# EAGLE board mjoy (EAGLE 5.10)
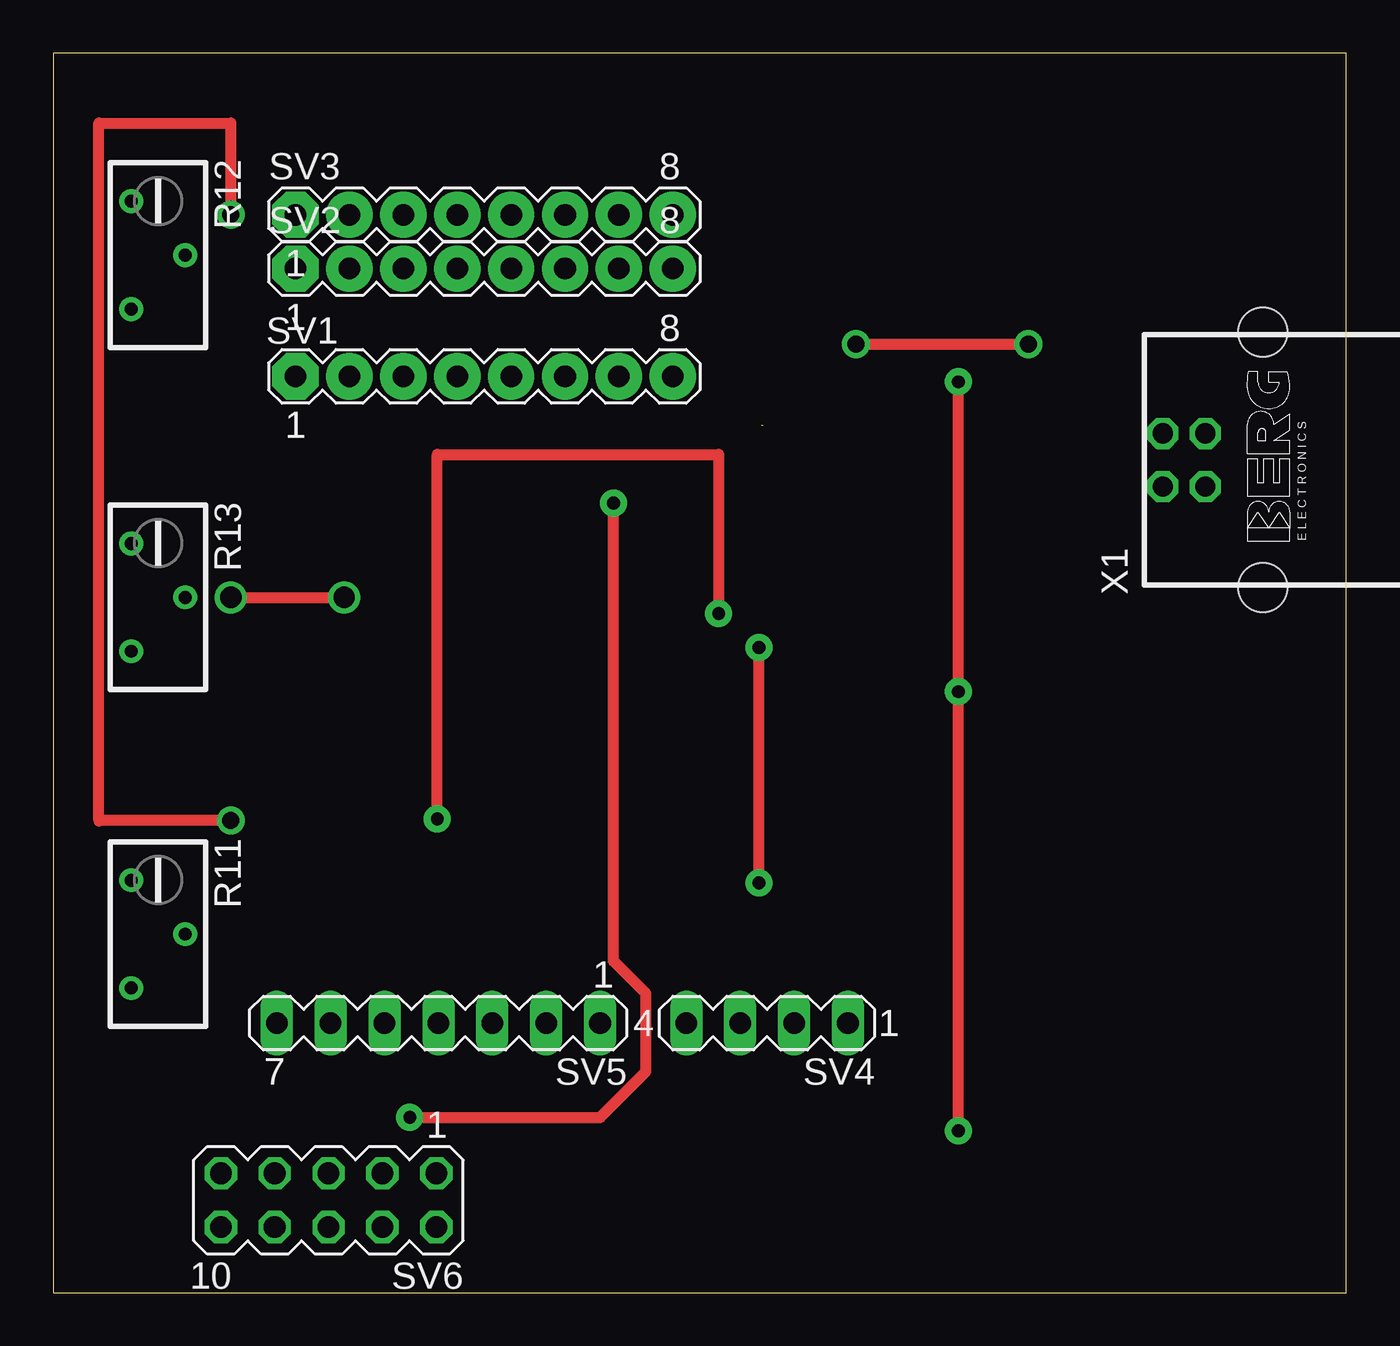
[diagram p0: board, top side]
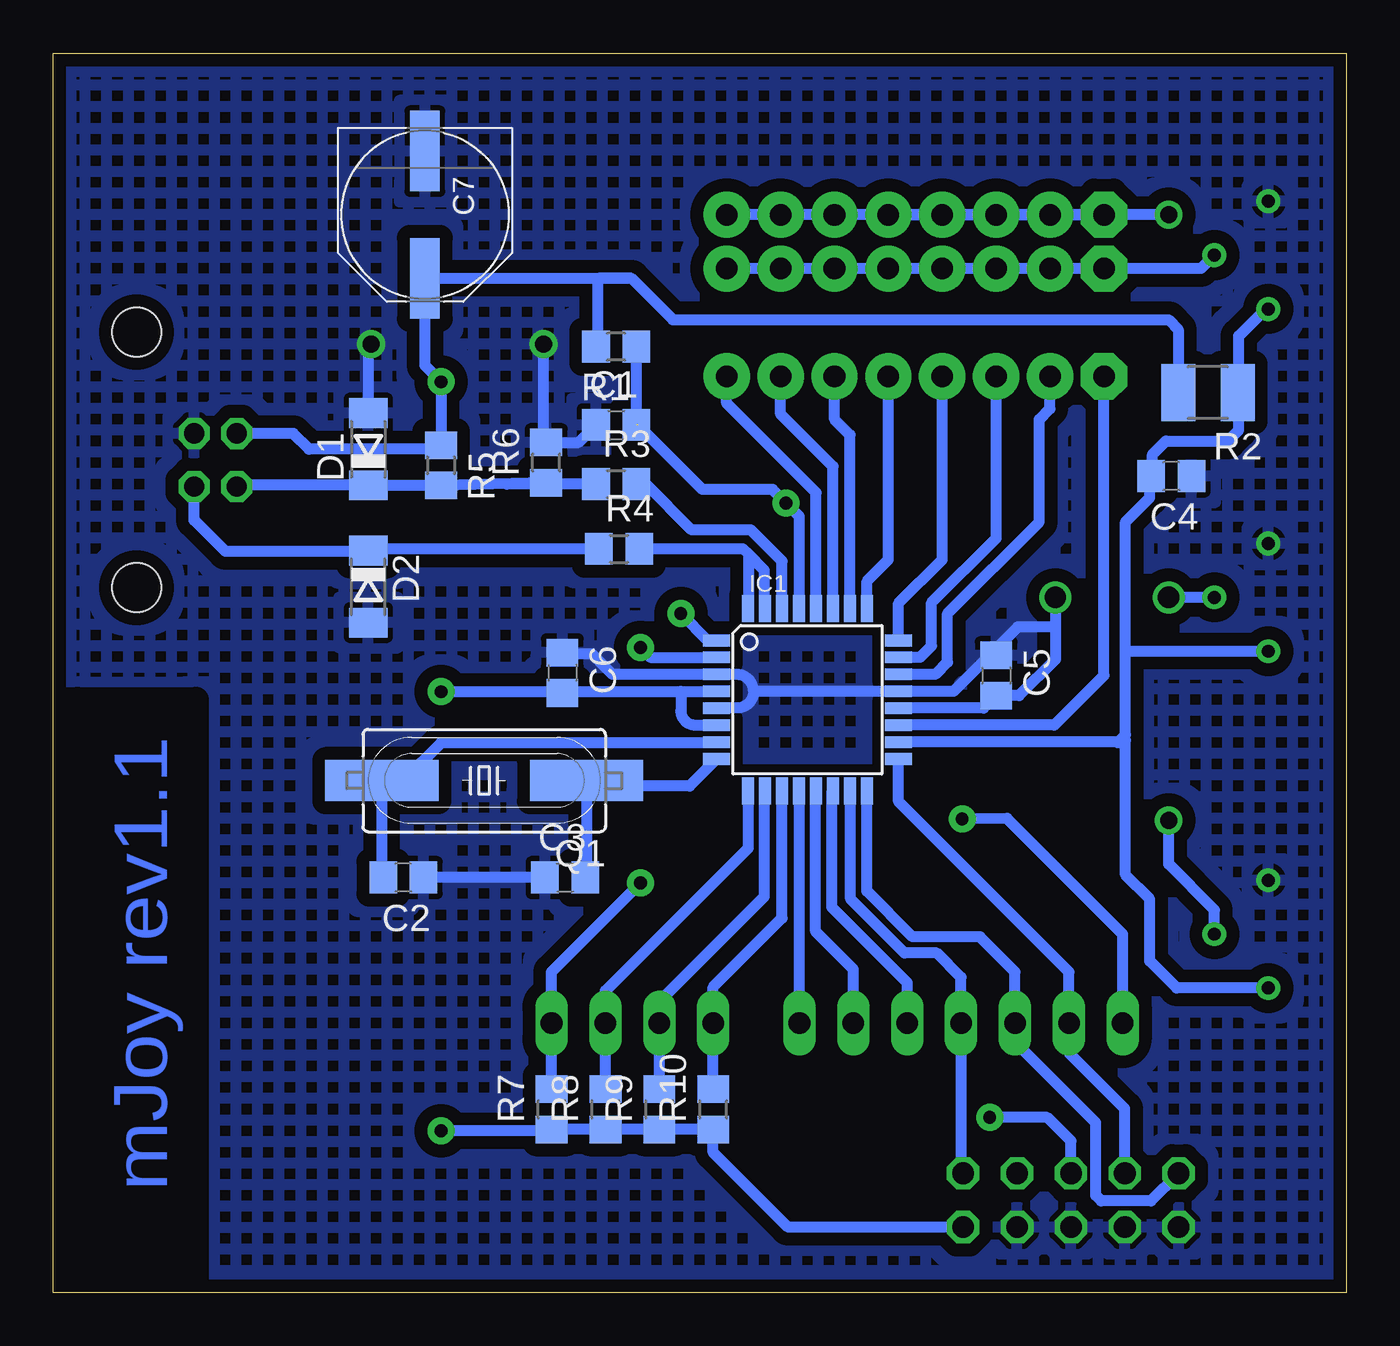
[diagram p1: board, bottom side, seen from below]

Size 60.96 x 58.42 mm. Coordinates in mm from the lower left corner, seen from the top.
Outline: 0,0 60.96,0 60.96,58.42 0,58.42 0,0
Copper layers (1*16): Top 0.035mm / dielectric 1.5mm / Bottom 0.035mm
Design rules "dimka": minimum track width 10mil, minimum drill 20mil, track to track 10mil, track to pad 10mil, pad to pad 10mil, via to via 10mil, smd to smd 10mil, copper to edge 10mil, drill to drill 10mil, minimum pad ring 10mil, minimum via ring 10mil, stop-mask expansion 4mil, vias tented up to drill 0mil, thermal gap 10mil
bRestrict: area 54.2,1 to 59.8,27.9

## Footprints (pad centres in the part's own frame; a part is rotated, then mirrored left to right if it is on the bottom)
C0805 = smd 1.3 x 1.5: 1 -0.95,0; 2 0.95,0
PANASONIC_E = smd 3.8 x 1.4: + 3,0; - -3,0
SOD80C = smd 1.4 x 1.8: A 1.7,0; C -1.7,0
TQFP32-08 = smd 1.27 x 0.559: 1 -4.293,2.8; 2 -4.293,2; 3 -4.293,1.2; 4 -4.293,0.4; 5 -4.293,-0.4; 6 -4.293,-1.2; 7 -4.293,-2; 8 -4.293,-2.8; 17 4.293,-2.8; 18 4.293,-2; 19 4.293,-1.2; 20 4.293,-0.4; 21 4.293,0.4; 22 4.293,1.2; 23 4.293,2; 24 4.293,2.8 | smd 0.559 x 1.27: 9 -2.8,-4.293; 10 -2,-4.293; 11 -1.2,-4.293; 12 -0.4,-4.293; 13 0.4,-4.293; 14 1.2,-4.293; 15 2,-4.293; 16 2.8,-4.293; 25 2.8,4.293; 26 2,4.293; 27 1.2,4.293; 28 0.4,4.293; 29 -0.4,4.293; 30 -1.2,4.293; 31 -2,4.293; 32 -2.8,4.293
HC49UP = smd 5.334 x 1.93: 1 -4.826,0; 2 4.826,0
R0805 = smd 1.3 x 1.5: 1 -0.95,0; 2 0.95,0
R1210 = smd 1.6 x 2.7: 1 -1.4,0; 2 1.4,0
RTRIM3296Y = drill 0.61 round: 1 1.27,-2.54; 2 -1.27,0; 3 1.27,2.54
MA08-1 = drill 1.016 pad 2.184 octagon: 1 -8.89,0 | drill 1.016 pad 2.184 round: 2 -6.35,0; 3 -3.81,0; 4 -1.27,0; 5 1.27,0; 6 3.81,0; 7 6.35,0; 8 8.89,0
MA04-1 = drill 1.016 long: 1 -3.81,0; 2 -1.27,0; 3 1.27,0; 4 3.81,0
MA07-1 = drill 1.016 long: 1 -7.62,0; 2 -5.08,0; 3 -2.54,0; 4 0,0; 5 2.54,0; 6 5.08,0; 7 7.62,0
MA05-2 = drill 1.016 octagon: 1 -5.08,-1.27; 2 -5.08,1.27; 3 -2.54,-1.27; 4 -2.54,1.27; 5 0,-1.27; 6 0,1.27; 7 2.54,-1.27; 8 2.54,1.27; 9 5.08,-1.27; 10 5.08,1.27
PN61729 = drill 0.95 octagon: 1 1.25,4.71; 2 -1.25,4.71; 3 -1.25,2.71; 4 1.25,2.71 | hole 2.3: -6.02,0; 6.02,0

## Placement (x,y rotation side)
C1  0.1u  [C0805]  34.42,40.89 0 bottom
C2  22p  [C0805]  44.45,19.56 180 bottom
C3  22p  [C0805]  36.83,19.56 0 bottom
C4  0.1u  [C0805]  8.25,38.48 180 bottom
C5  0.1u  [C0805]  16.51,29.08 270 bottom
C6  0.1u  [C0805]  36.96,29.21 270 bottom
C7  100u  [PANASONIC_E]  43.43,50.8 270 bottom
D1  3.3V  [SOD80C]  46.1,39.75 90 bottom
D2  3.3V  [SOD80C]  46.1,33.27 270 bottom
IC1  MEGA8-AI  [TQFP32-08]  25.4,27.94 0 bottom
Q1  12MHz  [HC49UP]  40.64,24.13 180 bottom
R1  10k  [R0805]  34.42,44.58 180 bottom
R2  10uH  [R1210]  6.53,42.42 180 bottom
R3  82  [R0805]  34.42,38.1 0 bottom
R4  82  [R0805]  34.29,35.05 0 bottom
R5  2k2  [R0805]  42.67,38.99 270 bottom
R6  4k7  [R0805]  37.72,39.12 90 bottom
R7  10k  [R0805]  37.47,8.64 90 bottom
R8  10k  [R0805]  34.93,8.64 90 bottom
R9  10k  [R0805]  32.39,8.64 90 bottom
R10  10k  [R0805]  29.85,8.64 90 bottom
R11  [RTRIM3296Y]  4.95,16.89 180 top
R12  [RTRIM3296Y]  4.95,48.9 180 top
R13  [RTRIM3296Y]  4.95,32.77 180 top
SV1  R_SIG  [MA08-1]  20.32,43.18 0 top
SV2  R_GND  [MA08-1]  20.32,48.26 0 top
SV3  R_VCC  [MA08-1]  20.32,50.8 0 top
SV4  BUT_X  [MA04-1]  33.66,12.7 180 top
SV5  BUT_Y  [MA07-1]  18.16,12.7 180 top
SV6  ISP  [MA05-2]  12.99,4.35 180 top
X1  USB-B  [PN61729]  57.02,39.24 90 top

## Library data of the parts
C1-C7 R1-R13 = rcl
D1 D2 = diode
IC1 = atmel
Q1 = crystal
SV1-SV6 = con-lstb
X1 = con-berg

## Nets
+5V: C6.2 C7.+ IC1.4 IC1.6 R1.2 R2.2 R5.1 R7.1 R8.1 R9.1 R10.1 SV6.2 X1.1
AREF: C5.2 IC1.20 R13.2
GND: C1.1 C2.1 C3.1 C4.1 C5.1 C6.1 C7.- D1.A D2.A IC1.3 IC1.5 IC1.21 R6.2 R11.1 R12.1 R13.1 SV6.4 SV6.6 SV6.8 SV6.10 X1.4
MISO: IC1.16 SV5.5 SV6.9
MOSI: IC1.15 SV5.4 SV6.1
N$2: C4.2 IC1.18 R2.1 R11.3 R12.3 R13.3
N$3: IC1.19 SV1.1
N$4: C3.2 IC1.8 Q1.1
N$5: C2.2 IC1.7 Q1.2
N$6: IC1.22 SV1.2
N$7: IC1.23 SV1.3
N$8: IC1.24 SV1.4
N$9: IC1.25 SV1.5
N$10: IC1.26 SV1.6
N$11: IC1.27 SV1.7
N$12: IC1.28 SV1.8
N$15: IC1.30 R3.2
N$16: IC1.31 IC1.32 R4.2
N$17: D1.C R3.1 R5.2 R6.1 X1.2
N$18: D2.C R4.1 X1.3
N$21: IC1.2 R7.2 SV4.1
N$22: IC1.9 R8.2 SV4.2
N$23: IC1.10 R9.2 SV4.3
N$24: IC1.11 R10.2 SV4.4
N$25: IC1.12 SV5.1
N$26: IC1.13 SV5.2
N$27: IC1.14 SV5.3
N$31: IC1.1 SV5.7
RESET: C1.2 IC1.29 R1.1 SV6.5
RGND: R12.2 SV2.1 SV2.2 SV2.3 SV2.4 SV2.5 SV2.6 SV2.7 SV2.8
RVCC: R11.2 SV3.1 SV3.2 SV3.3 SV3.4 SV3.5 SV3.6 SV3.7 SV3.8
SCK: IC1.17 SV5.6 SV6.7

## Tracks (layer width: path | path; a pad name or v marks a point on that pad's centre or on a via)
+5V  (via drill 0.6 pad 1.27)
  Top 0.508: v42.67,42.93 v42.67,28.32 v42.67,7.62
  Bottom 0.508: R10.1 R9.1 | 37.28,7.69 R7.1 R8.1 | 31.37,28.34 IC1.4 | 36.88,28.34 31.37,28.34 | 36.88,28.34 C6.2 | IC1.6 30.68,26.74 arc90 31.37,27.43 31.37,28.34 | X1.1 49.64,40.49 48.9,39.75 42.86,39.75 R5.1 | 36.88,28.34 42.67,28.34 v42.67,28.32 | R5.1 42.67,39.88 | R5.1 v42.67,42.93 43.43,43.69 43.43,47.75 43.39,47.75 C7.+ 33.7,47.8 | R10.1 29.85,6.6 26.32,3.08 SV6.2 | R10.1 R9.1 | 37.28,7.69 37.34,7.75 37.34,7.62 v42.67,7.62 | R9.1 R8.1 | R8.1 37.28,7.69 | 33.7,47.8 31.75,45.85 8.38,45.85 7.93,45.39 R2.2 | 33.7,47.8 35.26,47.8 35.31,47.75 35.31,44.64 R1.2
AREF  (via drill 1 pad 1.42)
  Top 0.508: v8.38,32.77 v13.72,32.77
  Bottom 0.508: IC1.20 17.1,27.54 C5.2 15.43,28.13 13.72,29.84 v13.72,32.77 | R13.2 v8.38,32.77
GND  (via drill 0.8 pad 1.27)
  Top 0.508: v37.85,44.7 v45.97,44.7
  Bottom 0.508: C3.1 C2.1 | C6.1 36.9,30.1 35.56,30.1 34.6,29.14 IC1.3 28.76,29.14 arc90 27.94,28.32 | 27.94,28.32 arc90 28.7,27.56 29.67,27.56 arc-90 IC1.5 | C1.1 36.2,40.07 R6.2 37.79,40.13 37.85,40.13 v37.85,44.7 | v45.97,44.7 46.1,44.7 D1.A | 14.03,31.37 15.49,31.37 18.52,28.34 IC1.21 27.92,28.34 27.94,28.32
  pour Bottom (isolate 0.61, hatched): 0,58.42 60.96,58.42 60.96,0 0,0
MISO
  Bottom 0.508: IC1.16 22.61,18.92 20.45,16.76 17.27,16.76 15.62,15.11 SV5.5 15.62,11.81 11.81,8 11.81,4.57 11.56,4.32 9.21,4.32 SV6.9
MOSI
  Bottom 0.508: IC1.15 23.37,23.61 23.37,18.54 20.83,16 19.3,16 18.16,14.86 SV5.4 18.16,5.71 SV6.1
N$2
  Bottom 0.508: C4.2 9.14,38.45 | C4.2 9.14,38.54 9.14,39.5 8.51,40.13 5.59,40.13 5.08,40.64 5.08,42.37 R2.1 5.08,42.47 5.08,45.09 3.81,46.35 R12.3 | C4.2 9.27,38.41 9.27,37.47 10.41,36.32 10.41,30.1 | IC1.18 10.83,25.94 10.79,25.91 | 10.41,30.1 10.41,26.29 10.79,25.91 | R13.3 10.29,30.23 10.41,30.1 | 10.79,25.91 10.54,25.91 10.41,26.04 10.41,19.68 9.27,18.54 9.27,15.62 8,14.35 R11.3
N$3
  Bottom 0.508: SV1.1 11.43,29.08 13.77,26.74 IC1.19
N$4
  Bottom 0.508: IC1.8 30.96,23.88 34.16,23.88 34.42,24.13 Q1.1 35.81,19.62 C3.2
N$5
  Bottom 0.508: IC1.7 29.72,25.91 42.67,25.91 44.45,24.13 Q1.2 45.47,19.62 C2.2
N$6
  Bottom 0.508: IC1.22 19.37,29.14 18.8,29.72 18.8,32 14.48,36.32 14.48,41.15 13.97,41.66 SV1.2
N$7
  Bottom 0.508: IC1.23 20.1,29.94 19.56,30.48 19.56,32.51 16.51,35.56 SV1.3
N$8
  Bottom 0.508: IC1.24 21.11,32.49 19.05,34.54 SV1.4
N$9
  Bottom 0.508: IC1.25 22.6,33.53 21.59,34.54 SV1.5
N$10
  Bottom 0.508: IC1.26 23.4,40.42 24.13,41.15 SV1.6
N$11
  Bottom 0.508: IC1.27 24.2,38.93 26.67,41.4 SV1.7
N$12
  Bottom 0.508: SV1.8 29.21,41.91 25,37.7 IC1.28
N$15
  Bottom 0.508: IC1.30 26.6,34.47 28.07,35.94 30.86,35.94 33.02,38.1 R3.2
N$16
  Bottom 0.508: IC1.31 27.43,32.27 27.43,34.04 28.19,34.8 | 28.19,34.8 28.45,35.05 R4.2 | IC1.32 28.19,34.8
N$17
  Bottom 0.508: R3.1 39.56,38.1 R6.1 R5.2 D1.C 52.26,38.05 X1.2
N$18
  Bottom 0.508: R4.1 46.02,35.05 D2.C 46.15,34.92 52.83,34.92 54.31,36.41 X1.3
N$21  (via drill 0.6 pad 1.27)
  Top 0.508: v33.27,19.3 v33.27,30.4
  Bottom 0.508: R7.2 SV4.1 37.47,15.11 v33.27,19.3 | IC1.2 32.81,29.94 v33.27,30.4
N$22
  Bottom 0.508: IC1.9 28.19,20.95 34.93,14.22 SV4.2 R8.2
N$23
  Bottom 0.508: IC1.10 27.43,23.61 27.43,18.67 32.39,13.72 SV4.3 R9.2
N$24
  Bottom 0.508: IC1.11 26.6,17.65 29.85,14.4 SV4.4 R10.2
N$25
  Bottom 0.508: IC1.12 25.78,23.63 SV5.1
N$26
  Bottom 0.508: IC1.13 25.02,23.63 25.02,17.02 23.24,15.24 SV5.2
N$27
  Bottom 0.508: IC1.14 24.26,23.59 24.26,18.16 20.7,14.61 SV5.3
N$31  (via drill 0.6 pad 1.27)
  Top 0.508: v31.37,32 31.37,39.5 18.11,39.5 v18.11,22.33
  Bottom 0.508: IC1.1 30.11,30.74 v31.37,32 | v18.11,22.33 16,22.35 10.54,16.89 SV5.7
RESET  (via drill 0.6 pad 1.27)  (1 unrouted)
  Top 0.508: v26.42,37.21 26.42,15.62 27.94,14.1 27.94,10.41 25.78,8.26 v16.81,8.26
  Bottom 0.508: 33.4,40.89 30.35,37.85 27.05,37.85 v26.42,37.21 25.8,36.59 IC1.29 | v16.81,8.26 14.1,8.26 12.99,7.14 SV6.5 | C1.2 R1.1
RGND
  Bottom 0.508: SV2.8 SV2.7 SV2.6 SV2.5 SV2.4 SV2.3 SV2.2 SV2.1 6.86,48.26 R12.2
RVCC  (via drill 0.8 pad 1.27)
  Top 0.508: v8.38,50.8 8.38,55.12 2.16,55.12 2.16,22.26 | 2.16,22.26 2.16,22.23 | v8.38,22.26 2.16,22.26
  Bottom 0.508: SV3.1 SV3.2 SV3.3 SV3.4 SV3.5 | SV3.5 SV3.6 SV3.7 SV3.8 | v8.38,50.8 SV3.5 | R11.2 6.22,18.03 8.38,20.19 v8.38,22.26
SCK
  Bottom 0.508: IC1.17 21.11,23.14 13.08,15.11 SV5.6 13.08,11.3 10.45,8.67 SV6.7

## Text on the board
Bottom: mJoy rev1.1